# Altium PCB EMU_comp.PcbDoc
Units mil, origin at the board's own origin, x right, y up, seen from the top; angles counter-clockwise.
Board outline 985.8 x 985.52 mil, 2 copper layers (Top Layer, Bottom Layer); 12 components, 12 nets, 70 pads, 5 vias.
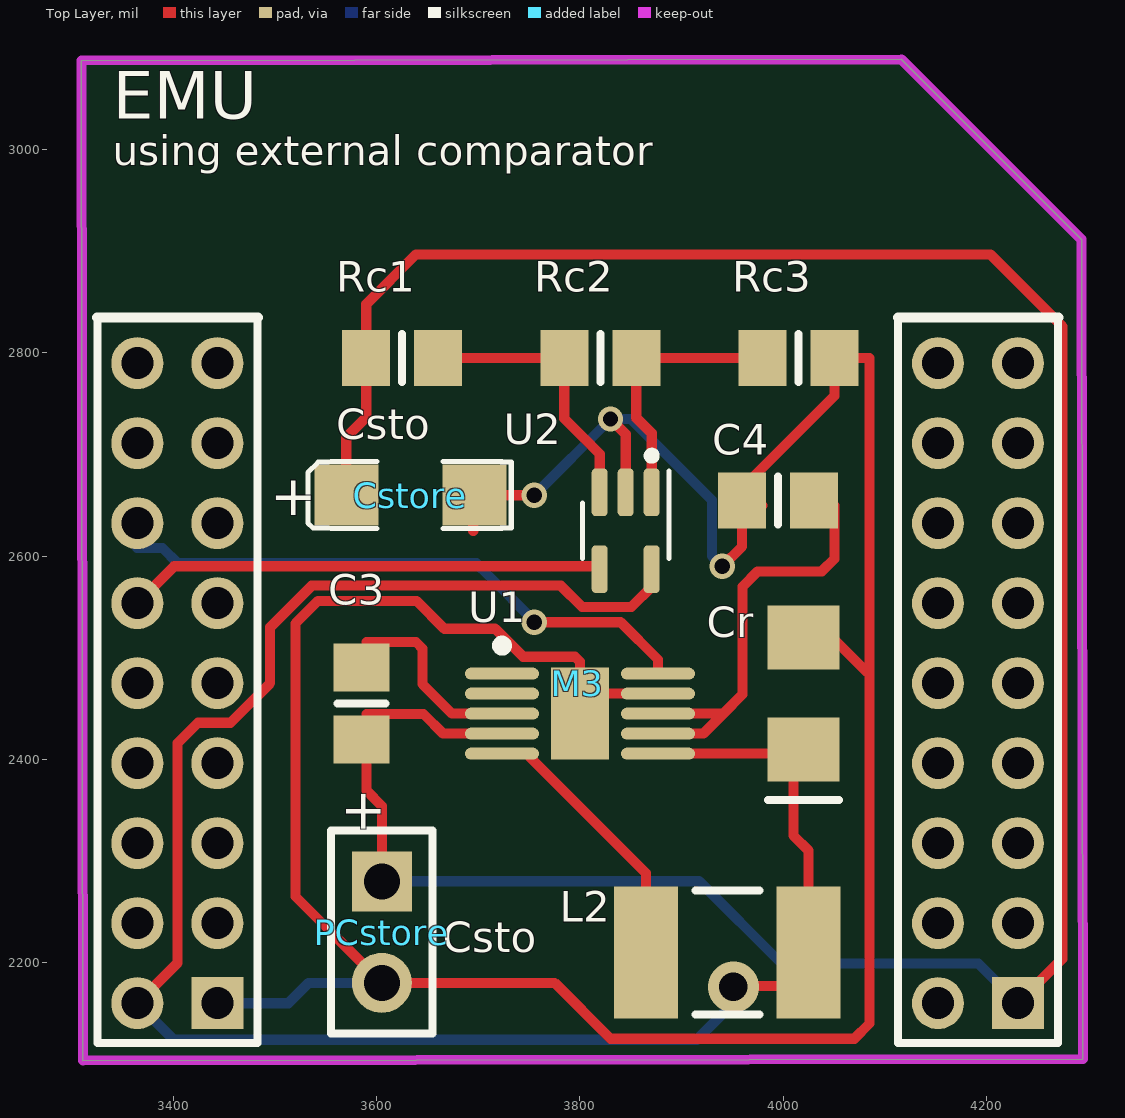
[diagram p0: Top Layer view]
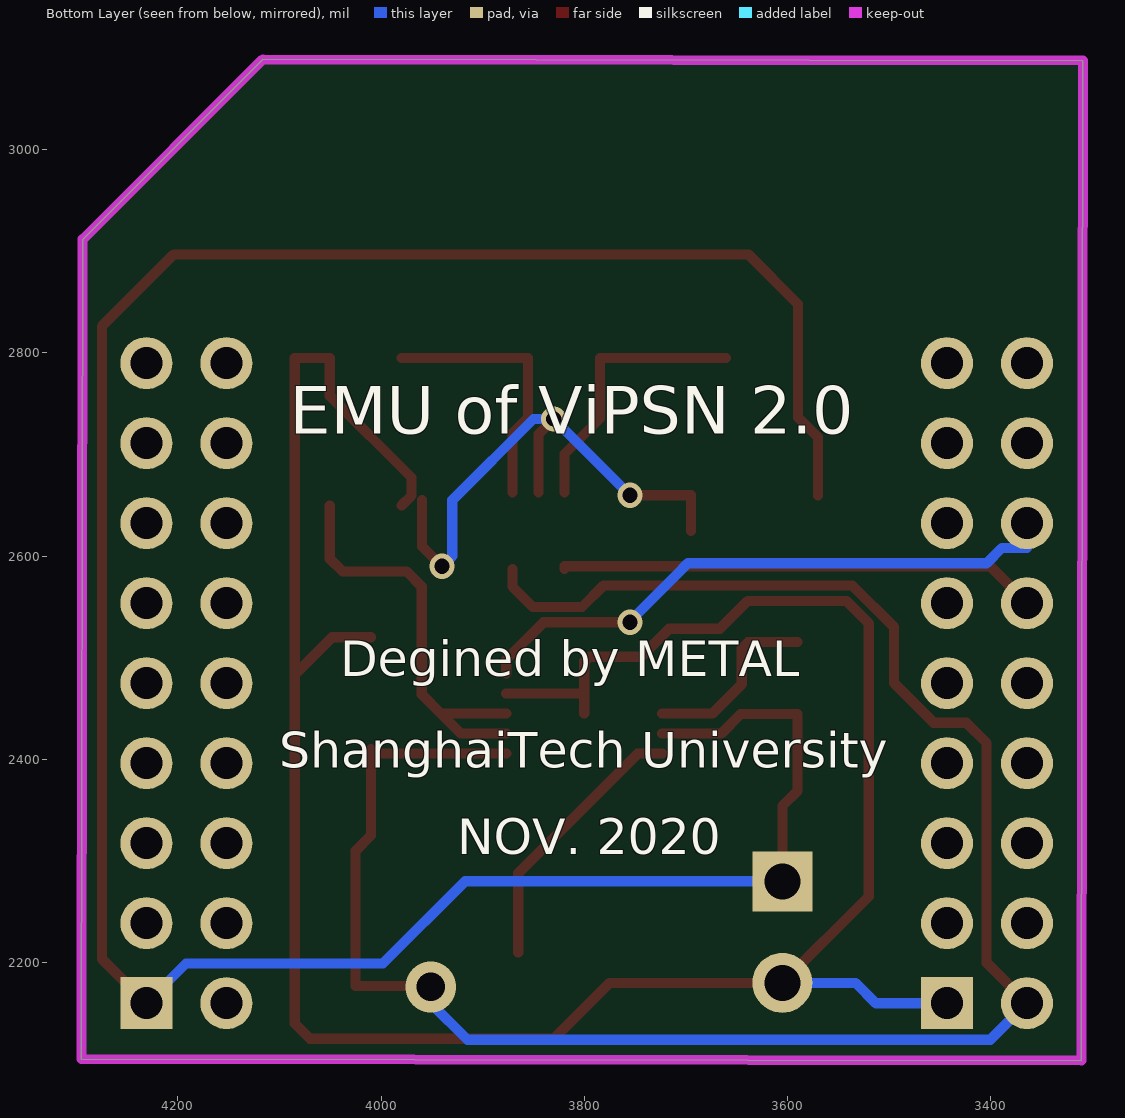
[diagram p1: Bottom Layer view, seen from below]

## Layer stack, top to bottom
Top Layer: signal copper 1.4
Dielectric: dielectric 12.6, FR-4, Dk 4.8
Bottom Layer: signal copper 1.4

## Board outline
3310.75,2103.45 3309.2,3087.7 4116.29,3088.97 4293.45,2911.81 4293.73,2912.09 4295,2105

## Design rules (kind name [scope] priority, off if disabled: settings)
Clearance [All] p1: gap=5
PolygonConnect [All] p1: connectstyle=Relief reliefconductorwidth=10 reliefentries=4 polygonreliefangle="90 Angle"
RoutingVias [All] p1: holewidth=28 width=50 viastyle="Through Hole" minholewidth=28 minwidth=50 maxholewidth=28 maxwidth=50
SilkscreenOverComponentPads SilkToSolderMaskClearance [IsPad] p1: minsilkscreentomaskgap=10
SolderMaskExpansion [All] p1: expansion=4
Width [All] p1: maxlimit=10 minlimit=10 preferedwidth=10
27 further rules are at their usual default settings.

## Components (designator, comment, footprint, x,y, rotation, side; value= is the part's Value field where it differs from the comment)
C3 "CAP" 6-0805_N 3585,2455 r270 top
C4 "CAP" 6-0805_N 3995,2655 r180 top
Cr "6.3V" 3216[1206] 4020,2465 r90 top
Cstore "Cap Pol1" 钽电容 3570,2665 r90 top
L2 "10uH" inductor 3945,2210 r0 top
M3 "MHDR2X18" module9x4 4230,2790 r180 top
PCstore "Header 2" HDR1X2 3605,2280 r270 top
Rc1 "Res1" 6-0805_N 3625,2795 r180 top
Rc2 "Res1" 6-0805_N 3820,2795 r180 top
Rc3 "Res1" 6-0805_N 4015,2795 r180 top
U1 "LTC3588-1" "LTC 3588-1" 3800,2445 r0 top
U2 "MIC841" MIC841 3845,2625 r0 top

## Footprints (in the part's own frame and the unit in brackets; to place one, negate y for a bottom-side part, rotate by r counter-clockwise, add the part's x,y. Pads: shape width x height; smd on the part's side, far side on the other; paste and mask are expansions set on the pad)
6-0805_N [mm] "Chip Resistor, Body 2.0x1.2mm, IPC Medium Density"
  rect 1.2x1.4 smd: 1(-0.9,0) 2(0.9,0)
  silkscreen extent 0,-0.6 0,0.6, body extent -1.07,-0.7 1.07,0.7, height 0.7
3216[1206] [mm] "Chip Resistor; Body 3.2 x 1.6 mm (LxW typ)"
  rect 1.6x1.8 smd: 1(-1.4,0) 2(1.4,0)
  silkscreen extent -2.67,-0.89 -2.67,0.89
HDR1X2 [mm] "Connector; Header; 2 Position"
  rect 1.5x1.5 hole 0.9: 1(0,0)
  round 1.5 hole 0.9: 2(2.54,0)
  silkscreen extent -1.27,-1.27 3.81,1.27
inductor [mm]
  rect 1.6x3.3 smd: 1(-2.032,0) 2(2.032,0)
  silkscreen extent -0.8,-1.55 0.8,1.55, body extent -2.4,-1.7 2.4,1.7, height 1.4
"LTC 3588-1" [mm] "10-Lead Plastic MSOP"
  oval 1.85x0.3 smd: 1(-1.95,1) 2(-1.95,0.5) 3(-1.95,0) 4(-1.95,-0.5) 5(-1.95,-1) 6(1.95,-1) 7(1.95,-0.5) 8(1.95,0) 9(1.95,0.5) 10(1.95,1)
  rect 1.45x2.3 smd: 11(0,0)
  silkscreen extent -2.07,1.58 -1.83,1.82, body extent -1.55,-1.55 1.55,1.55, height 1.1
MIC841 [mm]
  rrect50% 0.4x1.19 smd: 1(0.65,0.96) 2(0,0.96) 3(-0.65,0.96) 4(-0.65,-0.96) 5(0.65,-0.96)
  silkscreen extent -1.08,-0.7 1.08,1.97
module9x4 [mm]
  rect 1.3x1.3 hole 0.8: 1(-0.025,16.002) 36(19.99,16.002)
  round 1.3 hole 0.8: 2(21.99,16.002) 3(-0.025,14.002) 4(21.99,14.002) 5(-0.025,12.002) 6(21.99,12.002) 7(-0.025,10.002) 8(21.99,10.002) 9(-0.025,8.002) 10(21.99,8.002) 11(-0.025,6.002) 12(21.99,6.002) 13(-0.025,4.002) 14(21.99,4.002) 15(-0.025,2.002) 16(21.99,2.002) 17(-0.025,0.002) 18(21.99,0.002) 19(1.975,0.002) 20(19.99,0.002) 21(1.975,2.002) 22(19.99,2.002) 23(1.975,4.002) 24(19.99,4.002) 25(1.975,6.002) 26(19.99,6.002) 27(1.975,8.002) 28(19.99,8.002) 29(1.975,10.002) 30(19.99,10.002) 31(1.975,12.002) 32(19.99,12.002) 33(1.975,14.002) 34(19.99,14.002) 35(1.975,16.002)
  silkscreen extent -1.04,-1.14 22.99,17
钽电容 [mil]
  rect 60x62.99 smd: 1(-5,0) 2(-5,-125.98)
  silkscreen extent -38,-162 28,38

## Part data
C3 C4: "Capacitor"
Cr: library part "Cap Pol1", "Polarized Capacitor (Radial)"
Cstore: "Polarized Capacitor (Radial)"
L2: library part INDUCTOR
M3: "Header, 18-Pin, Dual row"
PCstore: "Header, 2-Pin"
Rc1 Rc2 Rc3: "Resistor"
U1: "Nanopower energy harvesting power supply"
U2: library part Component_1

## Via types
v1: diameter 25, hole 15, Top Layer to Bottom Layer, 4 vias
v2: diameter 50, hole 28, Top Layer to Bottom Layer, 1 vias

## Nets (pads, with @x,y where several pads share a name; then routed paths per layer and width w, separated by ;. In a path a pad name is that pad's centre, name@x,y a point inside that pad or via, vN(x,y) a via of type N, cw(c..) or ccw(c..) an arc to the next point about the centre after c; other vN are vias at no path point)
EXTI: M3.12 U2.4 | length 473
  Top Layer w10: M3.12 3400.55,2590 3819.41,2590 U2.4
EXTI2: M3.14 U1.10 | length 596.9
  Top Layer w10: v1(3755,2535) 3840,2535 3876.77,2498.23 U1.10
  Bottom Layer w10: M3.14 3364.25,2608 3389,2608 3404,2593 3698,2593 3710.5,2580.5 3755,2536 v1(3755,2535)
GND: C4.2 Cr.2 Cstore.2 M3.36 PCstore.2 Rc3.1 U1.9 U1.11 U2.2 | length 3022.3
  Top Layer w10: 3695,2625 3695,2660 Cstore.2 v1(3755,2660) ; U1.11 U1.11@3800,2464.69 ; v1(3830,2735) 3845,2720 U2.2 ; U1.9 U1.11@3800,2464.69 ; v1(3940,2590) 3959.57,2609.57 C4.2 ; C4.2@3979.57,2650 3970,2659.57 3970,2677.43 4050.43,2757.87 Rc3.1 4085,2795 4085,2140 4070,2125 3830,2125 3775,2180 PCstore.2 3520,2265 3520,2533.79 3542.21,2556 3639,2556 3666.5,2528.5 3716.5,2528.5 3744.01,2500.99 3795.01,2500.99 3800,2496 U1.11@3800,2464.69 ; Cr.2@4010,2520.12 4048,2520.12 4081.56,2486.56
  Bottom Layer w10: M3.36 3513,2160 3533,2180 PCstore.2 ; v1(3755,2660) v1(3830,2735) 3850,2735 3930,2655 3930,2600 v1(3940,2590)
HTH: Rc2.1 Rc3.2 U2.1 | length 262.6
  Top Layer w10: U2.1 3870.59,2721 3855.43,2736.16 Rc2.1 Rc3.2
LTH: Rc1.1 Rc2.2 U2.3 | length 270.8
  Top Layer w10: Rc1.1 Rc2.2 3784.57,2735.43 3819.41,2700.59 U2.3
NetC3_1: C3.1 U1.3 | length 182.9
  Top Layer w10: 3590,2515.43 3638.57,2515.43 3645,2509 3645,2474 3674,2445 U1.3
NetC4_1: C4.1 U1.7 U1.8 | length 423.8
  Top Layer w10: U1.7 3921.32,2425.32 3941,2445 ; U1.8 3941,2445 ; C4.1@4050.43,2650 4050.43,2597.43 4038,2585 3975,2585 3960,2570 3960,2464 3941,2445
NetL2_1: L2.1 U1.5 | length 268.5
  Top Layer w10: U1.5 3747.37,2405.63 3865,2288 L2.1
P0.02: M3.10
P0.05: M3.16
VDD: Cr.1 L2.2 M3.2 U1.6 U2.5 | length 1950.7
  Top Layer w10: M3.2 3404,2199.75 3404,2416 3424,2436 3456,2436 3495,2475 3495,2530 3536,2571 3781.17,2571 3802.17,2550 3850.59,2550 3870.59,2570 U2.5 ; U1.6 4005.75,2405.63 4010,2409.88 4010,2325 4025,2310 L2.2 4025,2177 3952,2177 v2(3951,2176)
  Bottom Layer w10: M3.2 3400.25,2124 3915,2124 3951,2160 v2(3951,2176)
VSTO: C3.2 Cstore.1 M3.1 PCstore.1 Rc1.2 U1.4 | length 2602.9
  Top Layer w10: Cstore.1 3570,2717 3589.57,2736.57 Rc1.2 3589.57,2848 3638.57,2897 4203.89,2897 4274.75,2826.13 4274.75,2203.75 M3.1 ; PCstore.1 3605,2354 3590,2369 3590,2444.57 3646,2444.57 3665.25,2425.32 U1.4
  Bottom Layer w10: PCstore.1 3917.28,2280 3998.28,2199 4192,2199 M3.1
pads on no net: M3.3 M3.4 M3.5 M3.6 M3.7 M3.8 M3.9 M3.11 M3.13 M3.15 M3.17 M3.18 M3.19 M3.20 M3.21 M3.22 M3.23 M3.24 M3.25 M3.26 M3.27 M3.28 M3.29 M3.30 M3.31 M3.32 M3.33 M3.34 M3.35 U1.1 U1.2

## Keep-outs
Keep-Out Layer:
  lines w10: 4293.45,2911.81 4116.29,3088.97 3309.2,3087.7 3310.75,2103.45 4295,2105 4293.73,2912.09

## Silkscreen, mask and mechanical layers (free items; w line width, h text height)
Top Overlay:
  text "EMU" at 3340,3015 h80
  text "using external comparator" at 3340,2975 h50
  text "Csto" at 3560,2715 h30
  text "+" at 3495,2640 h40
  text "+" at 3570,2371.3 h40 r270
  text "Csto" at 3665,2210 h30
Bottom Overlay:
  text "EMU of ViPSN 2.0" at 4090,2705 h80
  text "Degined by METAL" at 4040,2470 h60
  text "ShanghaiTech University" at 4100,2380 h60
  text "NOV. 2020" at 3925,2295 h60